# Altium PCB Transmitter.PcbDoc
Units mm, origin at the board's own origin, x right, y up, seen from the top; angles counter-clockwise.
Board outline 72.26 x 74.68 mm, 2 copper layers (Top Layer, Bottom Layer); 11 components, 17 nets, 81 pads, 2 vias.
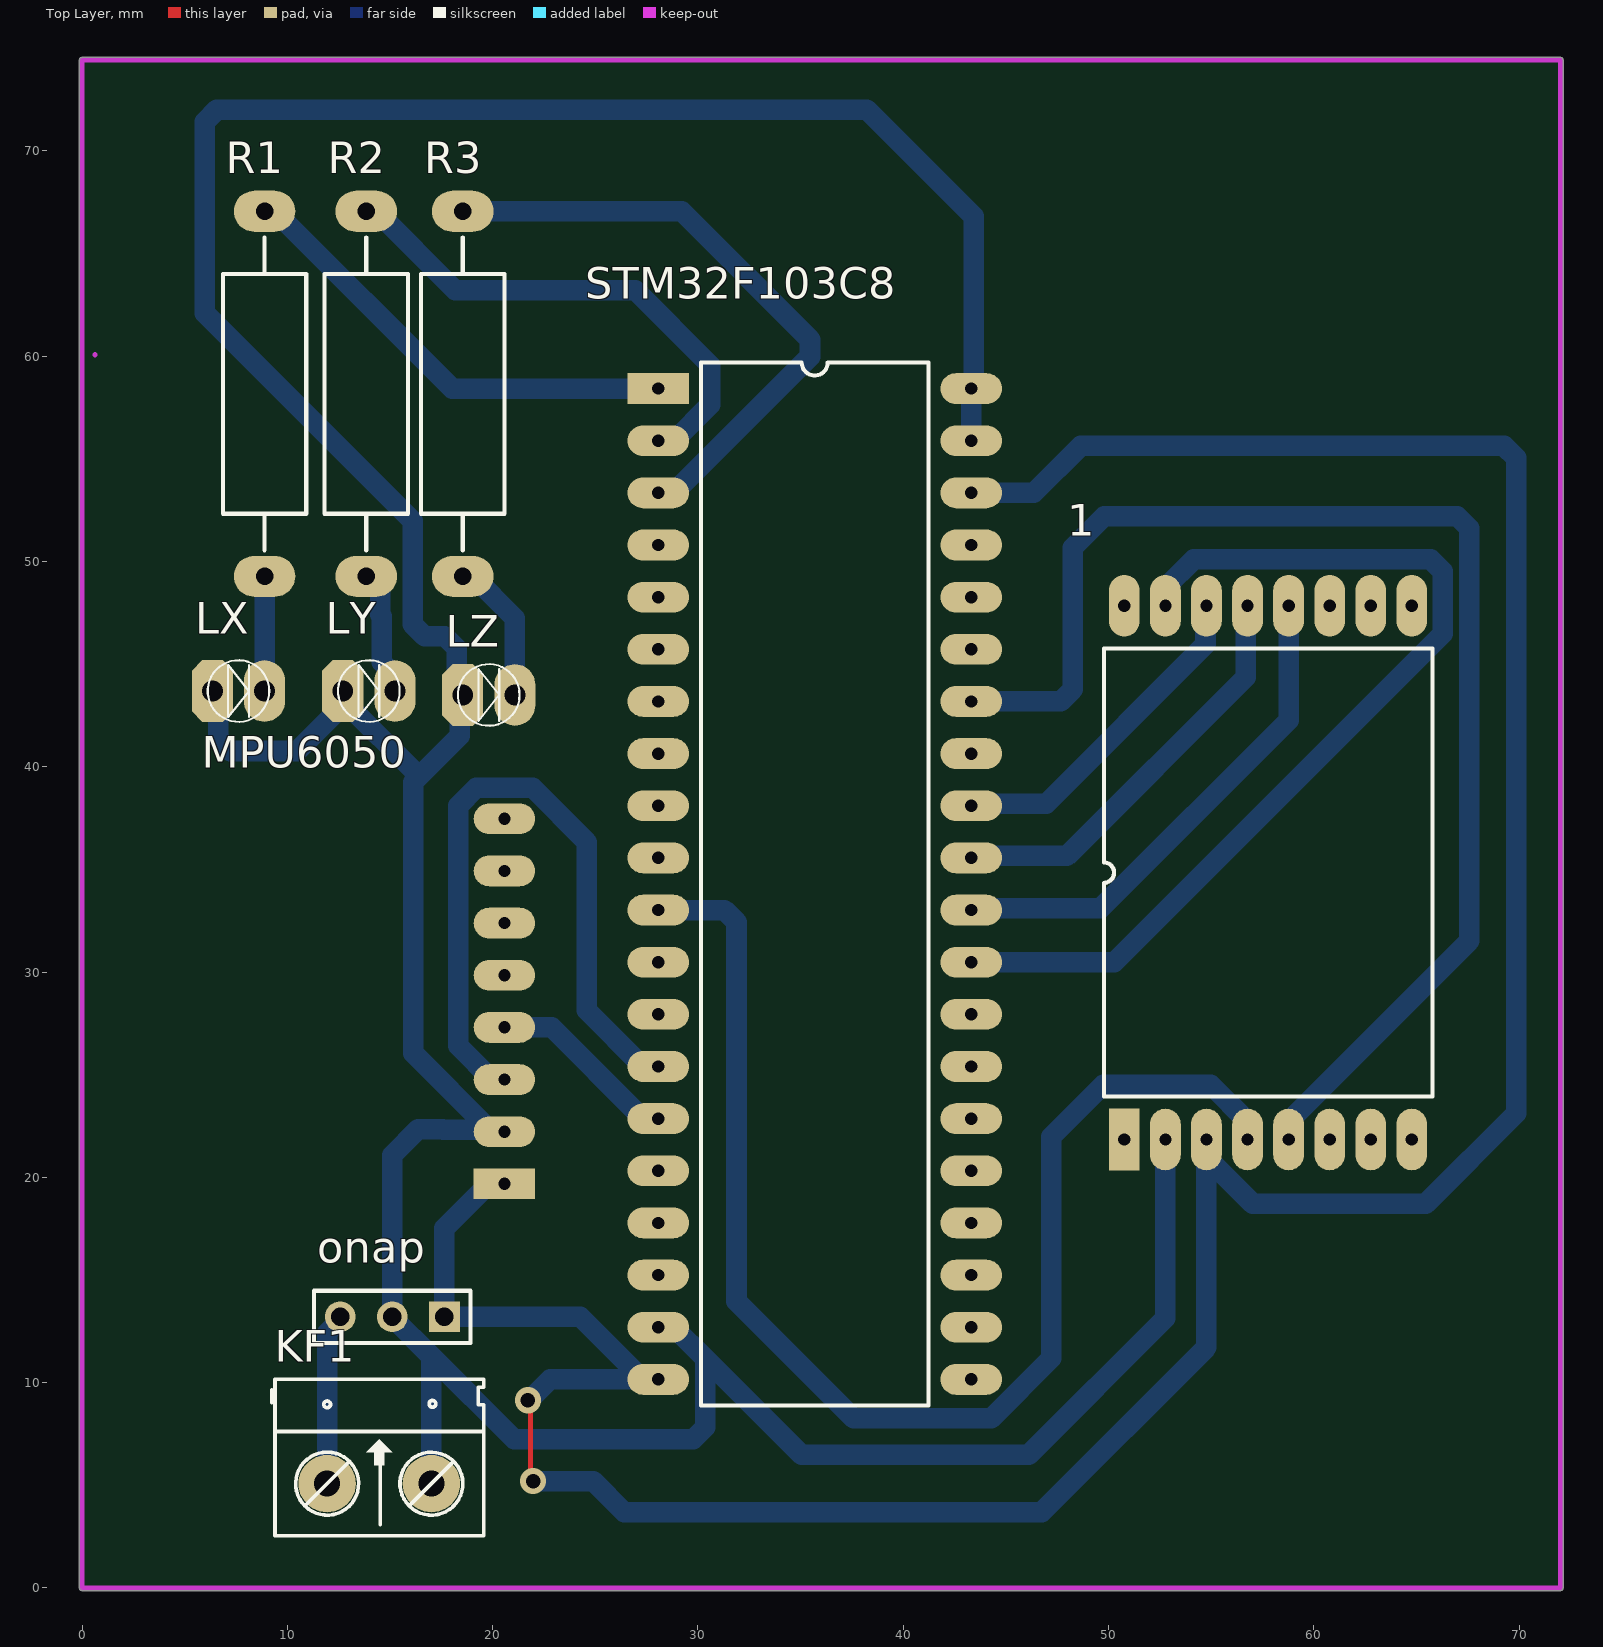
[diagram p0: Top Layer view]
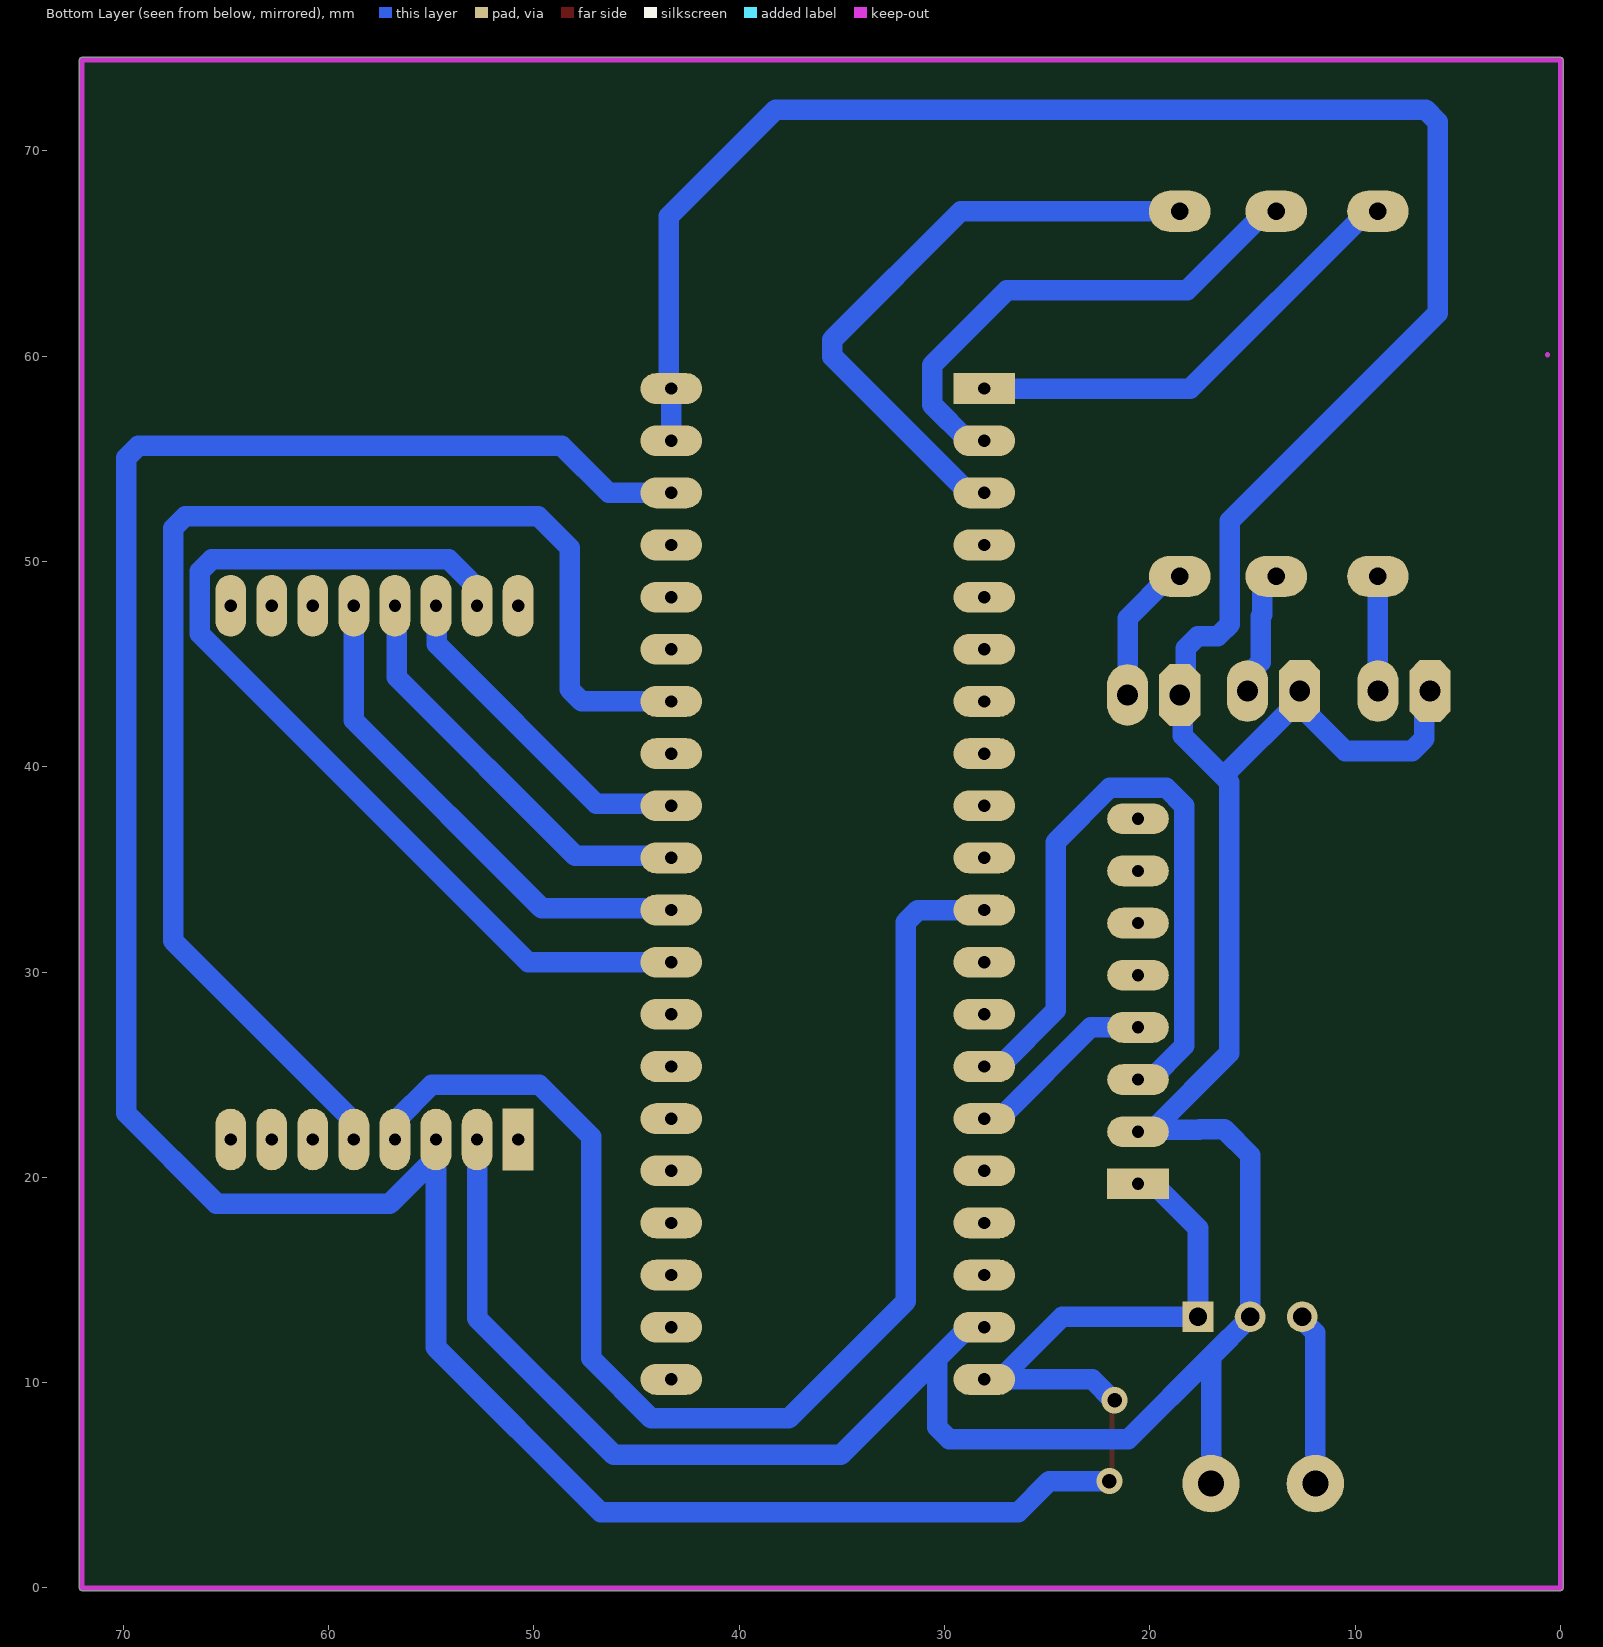
[diagram p1: Bottom Layer view, seen from below]
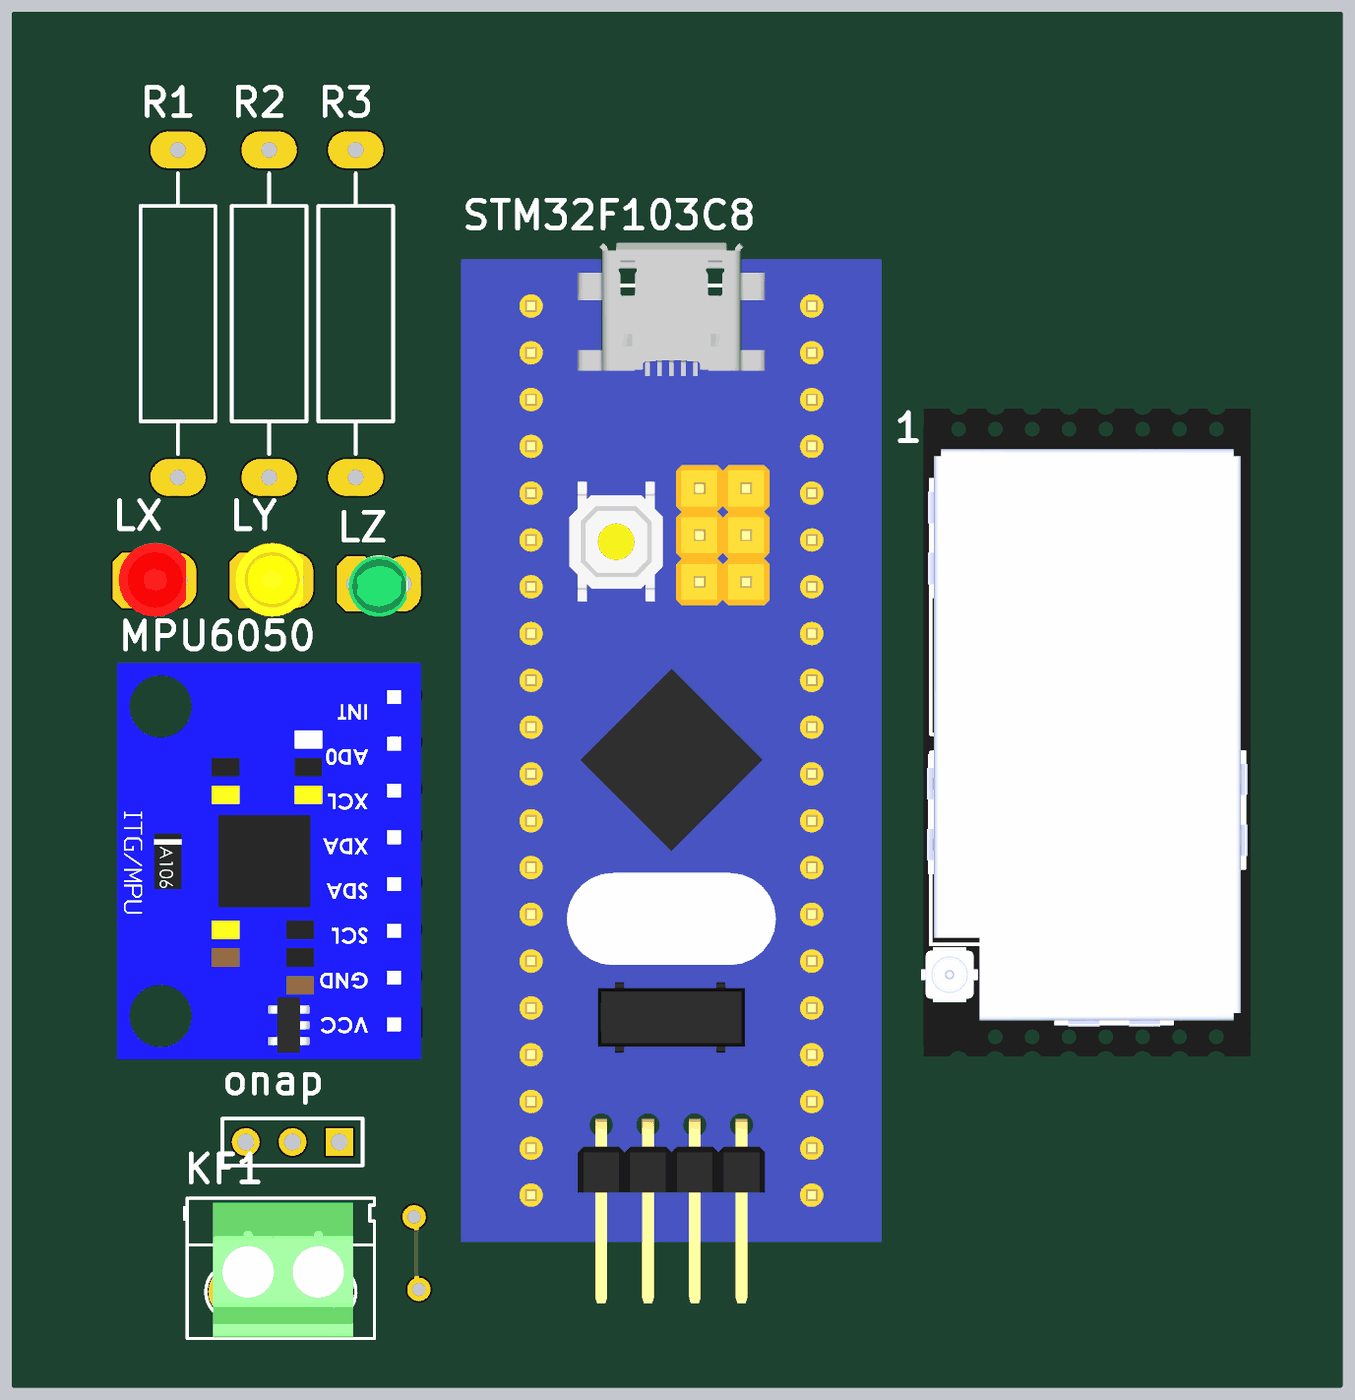
[diagram p2: 3D render of the assembled board from above, using the file's embedded part models]

## Layer stack, top to bottom
Top Solder: solder mask 0.0102, Solder Resist, Dk 3.5
Top Layer: signal copper 0.0356
Dielectric 1: dielectric 0.32, FR-4, Dk 4.8
Bottom Layer: signal copper 0.0356
Bottom Solder: solder mask 0.0102, Solder Resist, Dk 3.5

## Board outline
0,-0.127 cw(c0,0) -0.127,0 -0.127,74.422 cw(c0,74.422) 0,74.549 72.009,74.549 cw(c72.009,74.422) 72.136,74.422 72.136,0 cw(c72.009,0) 72.009,-0.127

## Design rules (kind name [scope] priority, off if disabled: settings)
Clearance [All] p1: gap=0.254 ignorepadtopadclearanceinfootprint=FALSE except(0: Arc-Hole Track-Hole SMDPad-Hole THPad-Hole Via-Hole Fill-Hole Poly-Hole Region-Hole Text-Hole)
PolygonConnect [All] p1: connectstyle=Relief reliefconductorwidth=0.254 reliefentries=4 polygonreliefangle="90 Angle" airgapwidth=0.254
RoutingVias [All] p1: holewidth=0.711 width=1.27 viastyle="Through Hole" minholewidth=0.711 minwidth=1.27 maxholewidth=0.711 maxwidth=1.27
SolderMaskExpansion [All] p1: expansion=0.102 istentingtop=FALSE
Width [All] p1: maxlimit=1 minlimit=0.254 preferedwidth=0.7 toplayer_maxwidth=0.254 toplayer_prefwidth=0.254 minimp=50.000000 maximp=50.000000 favimp=50.000000
30 further rules are at their usual default settings.

## Components (designator, comment, footprint, x,y, rotation, side; value= is the part's Value field where it differs from the comment)
1 "Component_1" "DIP16 - duplicate1" 50.769,21.844 r90 top
KF1 "CON 2 KF301" "Con 2 KF301 5.08" 11.938,5.08 r0 top
LX "LED 3mm" LED-3MM-RED 6.35,43.688 r0 top
LY "LED 3mm" LED-3MM-YELLOW 12.7,43.688 r0 top
LZ "LED 3mm" LED-3MM-GREEN 18.542,43.496 r0 top
MPU6050 "MOD MPU_6050" "MOD MPU-6050" 20.574,19.685 r90 top
onap "Header 3" HDR1X3 17.653,13.208 r180 top
R1 "Res Adj1" AXIAL-0.7 8.89,58.166 r90 top value=1K
R2 "Res Adj1" AXIAL-0.7 13.843,58.166 r90 top value=1K
R3 "Res Adj1" AXIAL-0.7 18.542,58.166 r90 top value=1K
STM32F103C8 "KIT STM32F103C8T6" "STM32F103 KIT" 28.067,58.42 r0 top

## Footprints (in the part's own frame and the unit in brackets; to place one, negate y for a bottom-side part, rotate by r counter-clockwise, add the part's x,y. Pads: shape width x height; smd on the part's side, far side on the other; paste and mask are expansions set on the pad)
AXIAL-0.7 [mm] "Axial Device, Thru-Hole; 2 Leads; 0.7 in Pin Spacing"
  oval 2x3 hole 0.85: 1(-8.89,0) 2(8.89,0)
  silkscreen extent -7.62,-2.03 7.62,2.03
"Con 2 KF301 5.08" [mil]
  round 110 hole 50: 1(0,0) 2(200,0)
  silkscreen extent -106,-100 300,200, body extent -45,-97 255,190, height 335
"DIP16 - duplicate1" [mm]
  rect 3x1.5 hole 0.6: 1(0,0)
  oval 3x1.5 hole 0.6: 2(0,-2) 3(0,-4) 4(0,-6) 5(0,-8) 6(0,-10) 7(0,-12) 8(0,-14) 9(26,-14) 10(26,-12) 11(26,-10) 12(26,-8) 13(26,-6) 14(26,-4) 15(26,-2) 16(26,0)
  silkscreen extent 2.08,-15 23.91,1, body extent -4,-16.38 31.18,1.52, height 2.1
HDR1X3 [mm] "Connector; Header; 3 Position"
  rect 1.5x1.5 hole 0.9: 1(0,0)
  round 1.5 hole 0.9: 2(2.54,0) 3(5.08,0)
  silkscreen extent -1.27,-1.27 6.35,1.27
LED-3MM-GREEN [mm]
  oct 2x3 hole 1.016: 1(0,0)
  oval 2x3 hole 1.016: 2(2.54,0)
  silkscreen extent -0.23,-1.5 2.77,1.5, body extent -0.38,-1.78 2.83,1.52, height 4.63
LED-3MM-RED [mm]
  oct 2x3 hole 1.016: 1(0,0)
  oval 2x3 hole 1.016: 2(2.54,0)
  silkscreen extent -0.23,-1.5 2.77,1.5, body extent -0.69,-1.97 2.98,2.03, height 4.6
LED-3MM-YELLOW [mm]
  oct 2x3 hole 1.016: 1(0,0)
  oval 2x3 hole 1.016: 2(2.54,0)
  silkscreen extent -0.23,-1.5 2.77,1.5, body extent -0.69,-1.97 2.98,2.03, height 4.6
"MOD MPU-6050" [mm]
  rect 1.5x3 hole 0.6: 0(0,0)
  oval 1.5x3 hole 0.6: 1(2.54,0) 2(5.08,0) 3(7.62,0) 4(10.16,0) 5(12.7,0) 6(15.24,0) 7(17.78,0)
  body extent -1.99,-1.52 19.51,14.98, height 11.03
"STM32F103 KIT" [mm]
  rect 3x1.5 hole 0.6: 1(0,0)
  oval 3x1.5 hole 0.6: 2(0,-2.54) 3(0,-5.08) 4(0,-7.62) 5(0,-10.16) 6(0,-12.7) 7(0,-15.24) 8(0,-17.78) 9(0,-20.32) 10(0,-22.86) 11(0,-25.4) 12(0,-27.94) 13(0,-30.48) 14(0,-33.02) 15(0,-35.56) 16(0,-38.1) 17(0,-40.64) 18(0,-43.18) 19(0,-45.72) 20(0,-48.26) 21(15.24,-48.26) 22(15.24,-45.72) 23(15.24,-43.18) 24(15.24,-40.64) 25(15.24,-38.1) 26(15.24,-35.56) 27(15.24,-33.02) 28(15.24,-30.48) 29(15.24,-27.94) 30(15.24,-25.4) 31(15.24,-22.86) 32(15.24,-20.32) 33(15.24,-17.78) 34(15.24,-15.24) 35(15.24,-12.7) 36(15.24,-10.16) 37(15.24,-7.62) 38(15.24,-5.08) 39(15.24,-2.54) 40(15.24,0)
  silkscreen extent 2.08,-49.53 13.16,1.27, body extent -3.81,-53.97 19.05,3.59, height 16.12

## Part data
KF1: "Cắm", Chung_Loai=Cắm, Don_Vi=Con, Ma_Hang=MH000987, Ten_Linh_Kien="CON 2 KF301-2P 5.08MM Xanh Dương"
LX: library part "LED 3mm Do", "Cắm", Chung_Loai=Cắm, Don_Vi=Con, Ma_Hang=MH003892, Ten_Linh_Kien="Led 3MM Phủ Đỏ (10c)"
LY: library part "LED 3mm Vang", "Cắm", Chung_Loai=Cắm, Don_Vi=Con, Ma_Hang=MH003893, Ten_Linh_Kien="Led 3MM Phủ Vàng (10c)"
LZ: library part "LED 3mm Xanh La", "Cắm", Chung_Loai=Cắm, Don_Vi=Con, Ma_Hang=MH001054, Ten_Linh_Kien="Led 3MM Phủ Xanh (10c)"
onap: "Header, 3-Pin", LatestRevisionDate=17-Jul-2002, LatestRevisionNote="Re-released for DXP Platform.", Publisher="Altium Limited"
R1 R2 R3: "Variable Resistor", LatestRevisionDate=17-Jul-2002, LatestRevisionNote="Re-released for DXP Platform.", PackageDescription="Axial Device, Thru-Hole; 2 Leads; 0.7 in Pin Spacing", PackageReference=AXIAL-0.7, Published=8-Jun-2000, Publisher="Altium Limited", Set Position=0.5
STM32F103C8: library part "STM32f103 Bluepill", "KIT STM32F103C8T6 Bluepill"

## Via types
v1: diameter 1.27, hole 0.711, Top Layer to Bottom Layer, 2 vias

## Nets (pads, with @x,y where several pads share a name; then routed paths per layer and width w, separated by ;. In a path a pad name is that pad's centre, name@x,y a point inside that pad or via, vN(x,y) a via of type N, cw(c..) or ccw(c..) an arc to the next point about the centre after c; other vN are vias at no path point)
Net1_2: 1.2 KF1.2 LX.1 LY.1 LZ.1 MPU6050.1 onap.2 STM32F103C8.19 STM32F103C8.39 STM32F103C8.40 | length 203.8
  Bottom Layer w1: LX.1 6.643,43.395 6.643,41.353 7.229,40.767 10.486,40.767 12.7,42.981 LY.1@12.7,43.247 ; LY.1 LY.1@12.7,43.247 ; KF1.2 17.018,11.277 ; LZ.1@18.542,43.203 18.401,43.062 18.401,41.515 16.417,39.531 ; LZ.1 18.249,43.789 18.249,45.769 17.663,46.355 16.683,46.355 16.097,46.941 16.097,51.975 5.986,62.086 5.986,71.423 6.572,72.009 38.227,72.009 43.434,66.802 43.434,58.547 STM32F103C8.40 STM32F103C8.39 ; MPU6050.1 20.478,22.321 MPU6050.1@19.864,22.321 ; STM32F103C8.19 28.829,12.7 30.353,11.176 ; 1.2 52.769,13.145 46.101,6.477 35.052,6.477 30.353,11.176 ; LY.1@12.7,43.247 16.417,39.531 ; 16.417,39.531 16.129,39.243 16.129,26.055 MPU6050.1@19.864,22.321 ; 17.018,11.277 21.056,7.239 29.767,7.239 30.353,7.825 30.353,11.176 ; 17.018,11.277 15.113,13.182 onap.2 15.113,21.082 16.383,22.352 17.562,22.352 17.593,22.321 MPU6050.1@19.864,22.321
Net1_3: 1.3 MPU6050.0 onap.1 STM32F103C8.20 STM32F103C8.38 | length 154.2
  Top Layer w0.254: v1(21.717,9.144) 21.844,9.017 21.844,5.334 v1(21.971,5.207)
  Bottom Layer w1: MPU6050.0 19.824,19.685 17.653,17.514 onap.1 24.269,13.208 STM32F103C8.20@27.317,10.16 ; v1(21.717,9.144) 21.79,9.144 22.806,10.16 STM32F103C8.20@27.317,10.16 ; v1(21.971,5.207) 24.892,5.207 26.416,3.683 46.736,3.683 54.769,11.716 1.3@54.769,20.967 ; STM32F103C8.20 STM32F103C8.20@27.317,10.16 ; STM32F103C8.38 46.355,53.34 48.641,55.626 69.264,55.626 69.85,55.04 69.85,23.114 65.46,18.724 57.012,18.724 1.3@54.769,20.967 ; 1.3 1.3@54.769,20.967
Net1_4: 1.4 STM32F103C8.11 | length 64.5
  Bottom Layer w1: STM32F103C8.11 31.291,33.02 31.877,32.434 31.877,13.97 37.592,8.255 44.279,8.255 47.207,11.183 47.207,21.984 49.735,24.511 54.979,24.511 56.769,22.721 1.4
Net1_5: 1.5 STM32F103C8.34 | length 65.7
  Bottom Layer w1: STM32F103C8.34 47.674,43.18 48.26,43.766 48.26,50.673 49.784,52.197 66.978,52.197 67.564,51.611 67.564,31.516 58.769,22.721 1.5
Net1_12: 1.12 STM32F103C8.30 | length 24.9
  Bottom Layer w1: STM32F103C8.30 43.403,33.116 49.626,33.116 58.769,42.259 1.12
Net1_13: 1.13 STM32F103C8.31 | length 20.5
  Bottom Layer w1: STM32F103C8.31 43.403,35.656 47.975,35.656 56.675,44.356 56.675,47.75 1.13
Net1_14: 1.14 STM32F103C8.32 | length 16.6
  Bottom Layer w1: STM32F103C8.32 43.403,38.196 46.959,38.196 54.722,45.959 54.722,47.797 1.14
Net1_15: 1.15 STM32F103C8.29 | length 47.8
  Bottom Layer w1: STM32F103C8.29 50.282,30.48 66.273,46.471 66.273,49.512 65.687,50.098 54.146,50.098 52.769,48.721 1.15
NetKF1_1: KF1.1 onap.3 | length 8.4
  Bottom Layer w1: KF1.1 11.938,12.438 12.573,13.073 onap.3
NetLX_2: LX.2 R1.1 | length 5.6
  Bottom Layer w1: LX.2 R1.1
NetLY_2: LY.2 R2.1 | length 6.3
  Bottom Layer w1: R2.1 14.072,49.276 14.534,48.814 14.534,47.394 14.605,47.323 14.605,45.094 15.24,44.459 LY.2
NetLZ_2: LZ.2 R3.1 | length 7.1
  Bottom Layer w1: R3.1 19.042,49.276 21.082,47.236 LZ.2
NetMPU6050_2: MPU6050.2 STM32F103C8.14 | length 35.2
  Bottom Layer w1: MPU6050.2 19.959,24.765 18.32,26.404 18.32,38.088 19.201,38.969 21.947,38.969 24.584,36.332 24.584,28.133 27.317,25.4 STM32F103C8.14
NetMPU6050_3: MPU6050.3 STM32F103C8.15 | length 9.3
  Bottom Layer w1: MPU6050.3 22.872,27.305 27.154,23.023 27.904,23.023 STM32F103C8.15
NetR1_2: R1.2 STM32F103C8.1 | length 22.8
  Bottom Layer w1: R1.2 9.39,67.056 18.026,58.42 STM32F103C8.1
NetR2_2: R2.2 STM32F103C8.2 | length 25.1
  Bottom Layer w1: R2.2 14.343,67.056 18.185,63.214 26.956,63.214 30.607,59.563 30.607,57.644 28.843,55.88 STM32F103C8.2
NetR3_2: R3.2 STM32F103C8.3 | length 30.5
  Bottom Layer w1: R3.2 29.21,67.056 35.457,60.809 35.457,59.98 28.98,53.503 28.23,53.503 STM32F103C8.3
pads on no net: 1.1 1.6 1.7 1.8 1.9 1.10 1.11 1.16 MPU6050.4 MPU6050.5 MPU6050.6 MPU6050.7 STM32F103C8.4 STM32F103C8.5 STM32F103C8.6 STM32F103C8.7 STM32F103C8.8 STM32F103C8.9 STM32F103C8.10 STM32F103C8.12 STM32F103C8.13 STM32F103C8.16 STM32F103C8.17 STM32F103C8.18 STM32F103C8.21 STM32F103C8.22 STM32F103C8.23 STM32F103C8.24 STM32F103C8.25 STM32F103C8.26 STM32F103C8.27 STM32F103C8.28 STM32F103C8.33 STM32F103C8.35 STM32F103C8.36 STM32F103C8.37

## Keep-outs
Keep-Out Layer:
  lines w0.254: 0,0 0,70.485 0,74.422 4.826,74.422 72.009,74.422 72.009,0 0,0 ; 0.635,60.071 0.635,60.071